# Altium PCB HT66F0185_NightLED_V4.0.PcbDoc
Units mil, origin at the board's own origin, x right, y up, seen from the top; angles counter-clockwise.
Board outline 1500 x 1600 mil, 2 copper layers (Top Layer, Bottom Layer); 62 components, 45 nets, 173 pads, 74 vias.
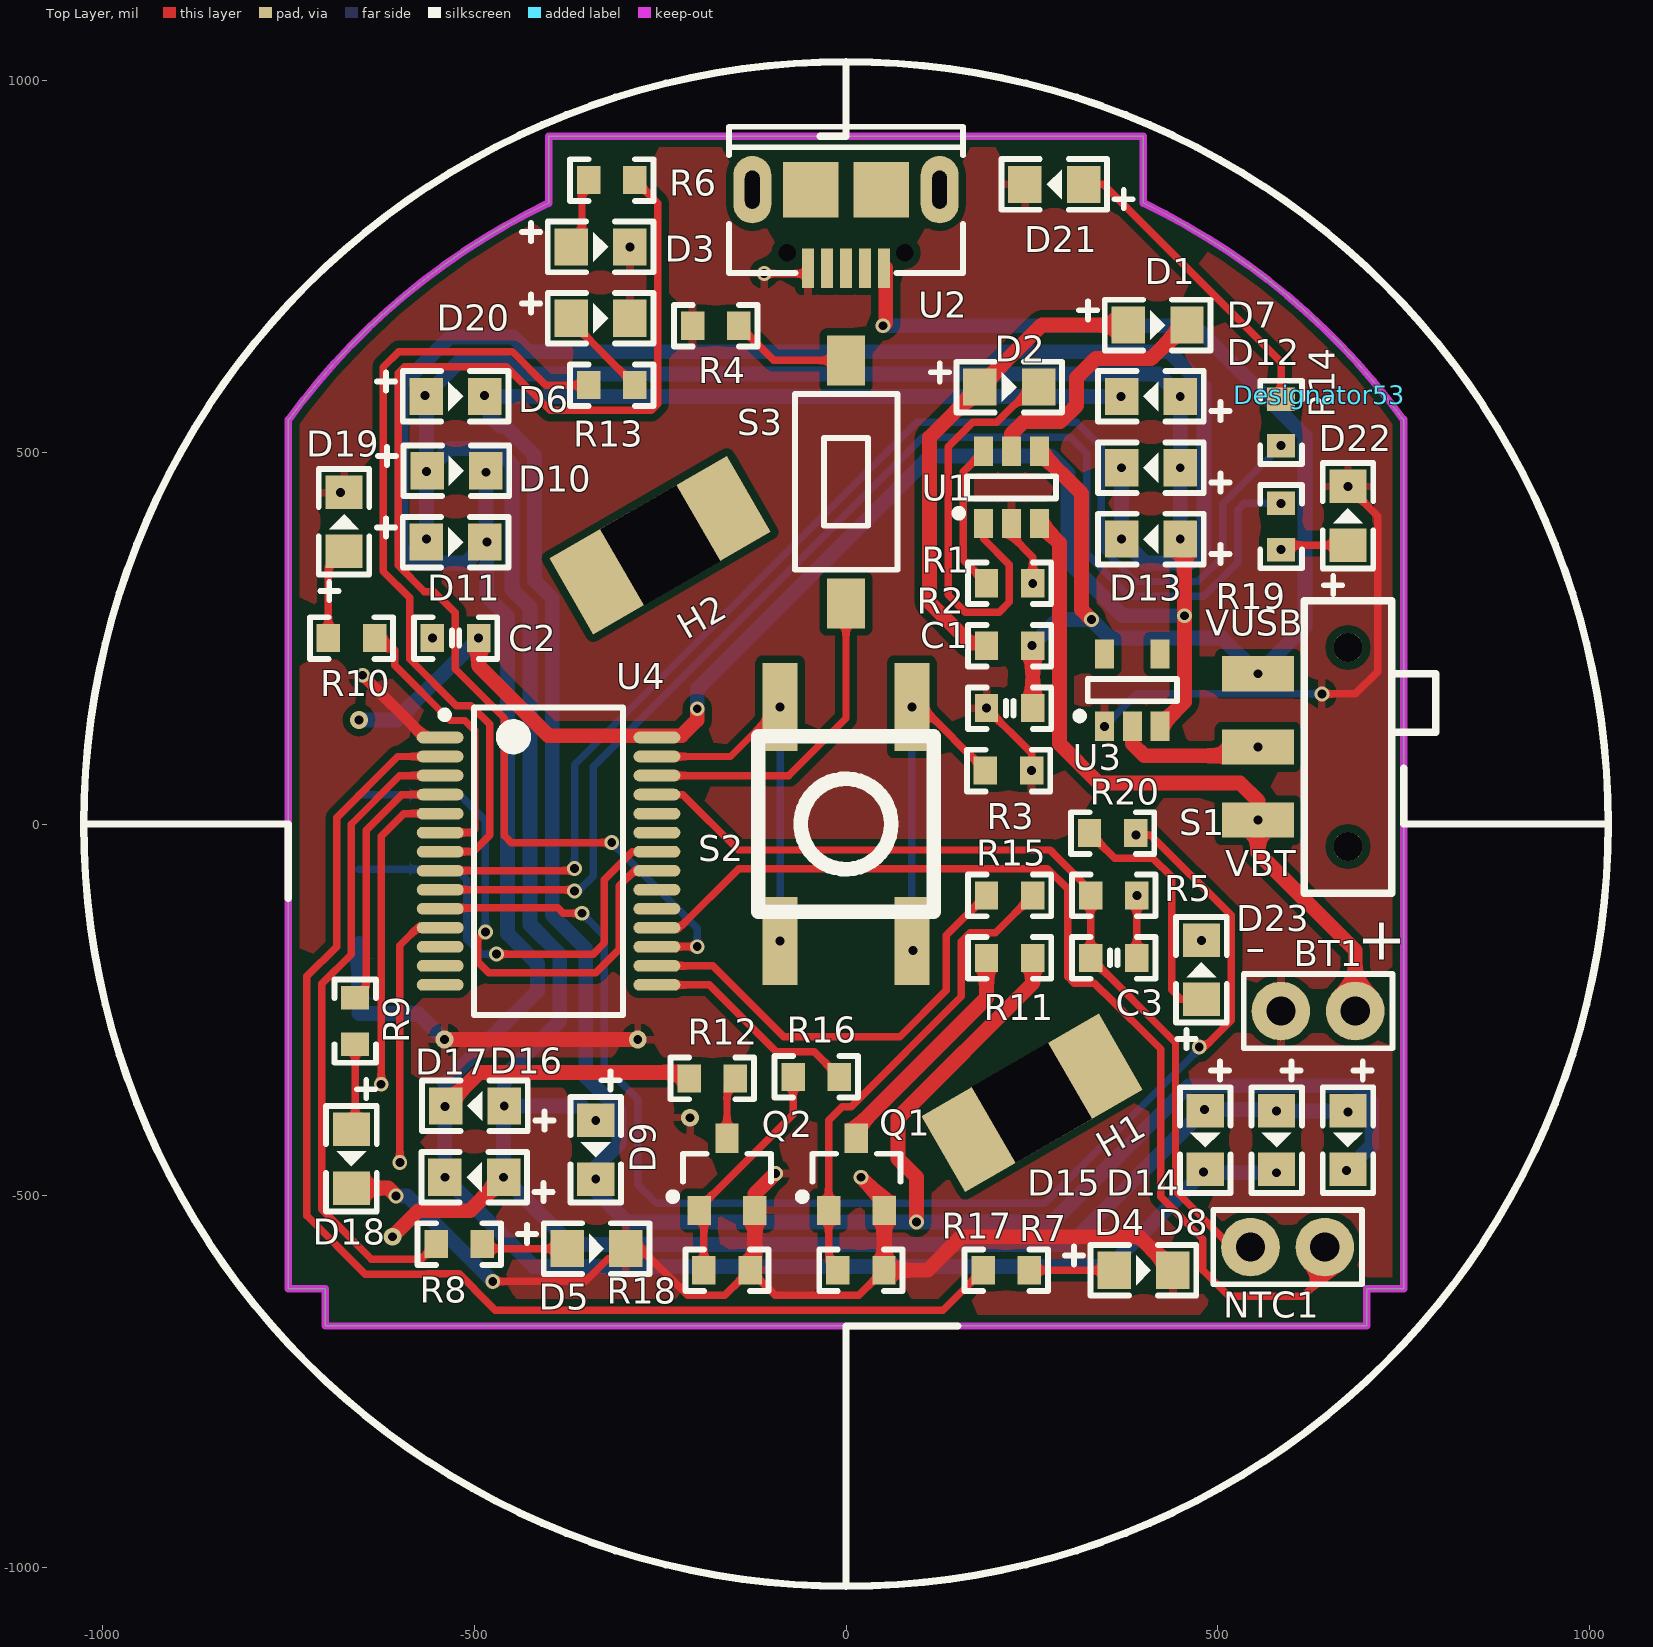
[diagram p0: Top Layer view]
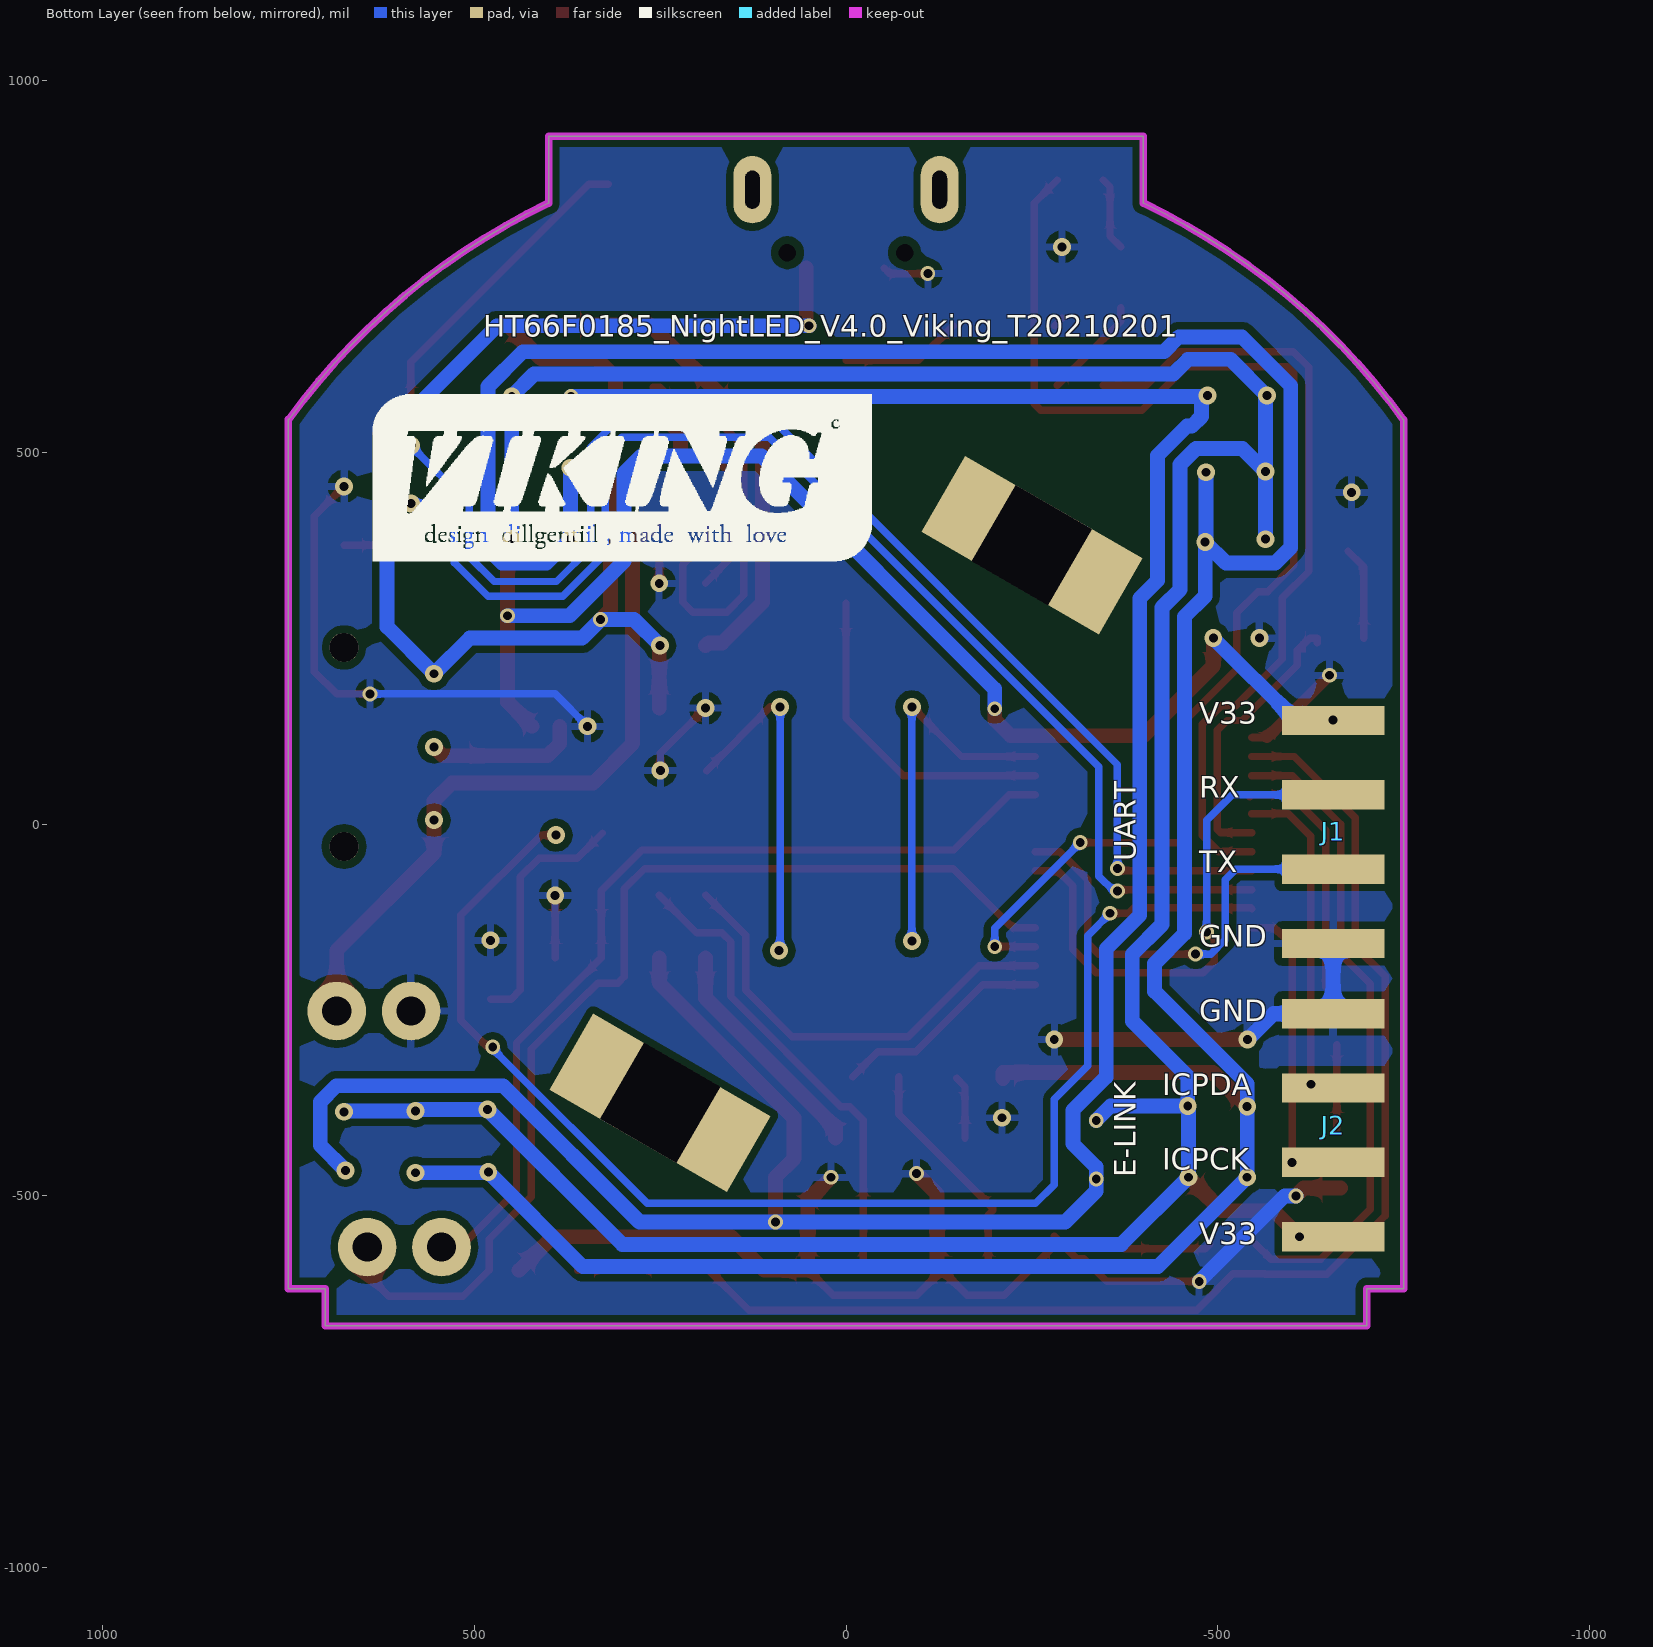
[diagram p1: Bottom Layer view, seen from below]

## Layer stack, top to bottom
Top Solder: solder mask 0.4, Solder Resist, Dk 3.5
Top Layer: signal copper 1.4
Dielectric 1: dielectric 12.6, FR-4, Dk 4.8
Bottom Layer: signal copper 1.4
Bottom Solder: solder mask 0.4, Solder Resist, Dk 3.5

## Board outline
-750,-625 -750,543.62 -749.65,543.36 cw(c0,0) -399.99,835 -400,835 -400,925 400,925 400,835 399.99,835 cw(c0,0) 749.13,544.09 750,544.09 750,-625 700,-625 700,-675 -700,-675 -700,-625

## Design rules (kind name [scope] priority, off if disabled: settings)
Clearance [All] p1: gap=10 ignorepadtopadclearanceinfootprint=TRUE except(0: Arc-Hole Track-Hole SMDPad-Hole THPad-Hole Via-Hole Fill-Hole Poly-Hole Region-Hole Text-Hole)
ComponentClearance [All] p1: gap=-1 collisioncheckmode=3 verticalgap=-1 showdistances=TRUE
HoleSize [All] p1: absolutevalues=TRUE maxlimit=500 minlimit=1 maxpercent=80.000 minpercent=20.000
MinimumSolderMaskSliver [All] p1: minsoldermaskwidth=1
PolygonConnect [All] p1: connectstyle=Relief reliefconductorwidth=10 reliefentries=4 polygonreliefangle="90 Angle" airgapwidth=10
RoutingVias [All] p1: holewidth=12 width=20 viastyle="Through Hole" minholewidth=10 minwidth=10 maxholewidth=50 maxwidth=100
SilkToSilkClearance [All] p1: silktosilkclearance=-1
SilkToSolderMaskClearance [IsPad] p1: minsilkscreentomaskgap=-1 clearancetoexposedcopper=TRUE
SolderMaskExpansion [All] p1: expansion=4
UnRoutedNet [All] p1: checkbadconnections=TRUE
Width [All] p1: maxlimit=20 minlimit=10 preferedwidth=20 minimp=50.000000 maximp=50.000000 favimp=50.000000
24 further rules are at their usual default settings.

## Components (designator, comment, footprint, x,y, rotation, side; value= is the part's Value field where it differs from the comment)
BT1 "BT_SMD" PIN_2 634.81,-251.5 r180 top
C1 "Cap" C_0603 220,155.79 r0 top value=104
C2 "Cap" C_0603 -525,250 r180 top value=104
C3 "Cap" C_0603 359.95,-180 r180 top value=103
D1 "LED0" LED_0805(Y) 419.03,670.95 r0 top
D2 "LED0" LED_0805(Y) 219.5,587.58 r0 top
D3 "LED0" LED_0805(Y) -330,776 r0 top
D4 "LED0" LED_0805(Y) 400,-600 r0 top
D5 "LED0" LED_0805(Y) -335.47,-570.95 r0 top
D6 "LED0" LED_0805(Y) -525,575 r0 top
D7 "LED0" LED_0805(Y) 410,575 r180 top
D8 "LED0" LED_0805(Y) 675,-425 r270 top
D9 "LED0" LED_0805(Y) -336.47,-438 r270 top
D10 "LED0" LED_0805(Y) -523.89,475 r0 top
D11 "LED0" LED_0805(Y) -525,379.05 r0 top
D12 "LED0" LED_0805(Y) 410,479.05 r180 top
D13 "LED0" LED_0805(Y) 410,383.11 r180 top
D14 "LED0" LED_0805(Y) 579.05,-425 r270 top
D15 "LED0" LED_0805(Y) 483.11,-425 r270 top
D16 "LED0" LED_0805(Y) -499,-379.05 r180 top
D17 "LED0" LED_0805(Y) -500,-475 r180 top
D18 "LED0" LED_0805(Y) -665,-450 r270 top
D19 "LED0" LED_0805(Y) -675,406.53 r90 top
D20 "LED0" LED_0805(Y) -330,680.05 r0 top
D21 "LED0" LED_0805(Y) 280,860 r180 top
D22 "LED0" LED_0805(Y) 675,414.5 r90 top
D23 "LED0" LED_0805(Y) 477.89,-195.89 r90 top
Designator53 "Comment" LOGO_VIKING_S 636.56,577 r180 top
H1 "HOLE" "SCREW HOLE_NIGHTLED_V4.0" 250,-375 r120 top locked
H2 "HOLE" "SCREW HOLE_NIGHTLED_V4.0" -250,375 r120 top locked
J1 "SIP4" "PIN_4(SMD) - duplicate" -555.79,139.29 r0 bottom locked
J2 "SIP4" "PIN_4(SMD) - duplicate" -555.79,-255 r0 bottom locked
NTC1 "NTC-5516" PIN_2 593.92,-568.92 r180 top
Q1 "NPN-8050" SOT_23_3 14.01,-471.05 r0 top
Q2 "NPN-8050" SOT_23_3 -160,-471.05 r0 top
R1 "Res1" R_0603 220,323.68 r180 top value=1.66k
R2 "Res1" R_0603 220,239.73 r180 top value=1.66k
R3 "Res1" R_0603 218.61,71.84 r180 top value=1.66k
R4 "Res1" R_0603 -175.05,670.05 r0 top value=1.66k
R5 "Res1" R_0603 359.95,-96.05 r180 top value=100k
R6 "Res1" R_0603 -315,865.95 r0 top value=1.66k
R7 "Res1" R_0603 215.47,-600 r180 top value=1.66k
R8 "Res1" R_0603 -520,-564.95 r180 top value=1.66k
R9 "Res1" R_0603 -660,-265 r90 top value=1.66k
R10 "Res1" R_0603 -664.95,250 r0 top value=1.66k
R11 "Res1" R_0603 220,-180 r180 top value=1k
R12 "Res1" R_0603 -179.95,-342.11 r0 top value=1k
R13 "Res1" R_0603 -315,590.11 r180 top value=1.66k
R14 "Res1" R_0603 585.05,539.95 r270 top value=1.66k
R15 "Res1" R_0603 220,-96.05 r180 top value=1k
R16 "Res1" R_0603 -40,-340 r0 top value=1k
R17 "Res1" R_0603 20,-600 r0 top value=100k
R18 "Res1" R_0603 -160,-600 r0 top value=100k
R19 "Res1" R_0603 585.05,400 r90 top value=1.66k
R20 "Res1" R_0603 358.56,-12.11 r0 top value=1.66k
S1 "SW-SPDT" SW-SPDT 675,103.59 r270 top
S2 "SW-PB" "MICRO BUTTON_4_SMD" 0,0 r90 top locked
S3 "SW-PB" "micro button_2_SMD" 0,460 r90 top
U1 "TP4057" SOT_23_6 222.6,452.63 r0 top
U2 "USB_ISP_V5" MICROUSB 0,925 r180 top locked
U3 "HT7533-3" SOT_23_5 385,180 r0 top
U4 "HT66F0185" SSOP_28 -400,-50 r0 top locked

## Footprints (in the part's own frame and the unit in brackets; to place one, negate y for a bottom-side part, rotate by r counter-clockwise, add the part's x,y. Pads: shape width x height; smd on the part's side, far side on the other; paste and mask are expansions set on the pad)
C_0603 [mm]
  rect 0.8x0.96 smd: 1(-0.79,0) 2(0.79,0)
  silkscreen extent -1.42,-0.71 1.42,0.71, body extent -0.76,-0.39 0.76,0.39, height 0.9
LED_0805(Y) [mil]
  rect 45x50 smd: 1(-39.5,0) 2(39.5,0)
  silkscreen extent -106,-34 71,34, body extent -40,-25 40,25, height 39
LOGO_VIKING_S [mil]
"micro button_2_SMD" [mm]
  rect 1.7x1.3 smd: 1(-4.15,0) 2(4.15,0)
  silkscreen extent -3,-1.76 3,1.74, body extent -4.5,-1.75 4.5,1.75, height 4.51
"MICRO BUTTON_4_SMD" [mm]
  rect 3x1.2 smd: 1(-4,2.25) 1(4,2.25) 2(-4,-2.25) 2(4,-2.25)
  silkscreen extent -3,-3 3,3, body extent -3.55,-3 3.55,3, height 5.51
MICROUSB [mm]
  round 0.3 hole 0.6: 0(-2,3.981) 0(2,3.981)
  rect 0.4x1.35 smd: 1(-1.3,4.506) 2(-0.65,4.506) 3(0,4.506) 4(0.65,4.506) 5(1.3,4.506)
  oval 1.3x2.3 hole 0.5 slot 1.3 at 90 deg: 6(-3.2,1.831) 6(3.2,1.831)
  rect 1.9x1.9 smd: 6(-1.2,1.831) 6(1.2,1.831)
  silkscreen extent -4,-0.32 4,4.68
PIN_2 [mm]
  round 2 hole 1: 1(-1.27,0) 2(1.27,0)
  silkscreen extent -2.54,-1.27 2.54,1.27, body extent -2.54,-1.27 2.54,1.27, height 8.51
"PIN_4(SMD) - duplicate" [mm]
  rect 3.5x1 smd: 1(-2.52,7.62) 2(-2.52,5.08) 3(-2.52,2.54) 4(-2.52,0)
  body extent -4.04,-1.27 -1.5,8.77, height 8.51
R_0603 [mm]
  rect 0.8x0.96 smd: 1(-0.79,0) 2(0.79,0)
  silkscreen extent -1.42,-0.71 1.42,0.71, body extent -0.76,-0.38 0.76,0.38, height 0.41
"SCREW HOLE_NIGHTLED_V4.0" [mm]
  rect 3x7 hole 3 square: 19(0,0)
  body extent -2.6,-2.6 2.6,2.6, height 2.55
SOT_23_3 [mm]
  rect 0.8x1 smd: 1(0,1.235) 2(-0.95,-1.235) 3(0.95,-1.235)
  silkscreen extent -1.98,-0.89 1.5,0.7, body extent -1.45,-1.19 1.45,1.19, height 1.02
SOT_23_5 [mm]
  rect 0.65x1 smd: 1(-0.95,-1.235) 2(0,-1.235) 3(0.95,-1.235) 4(0.95,1.235) 5(-0.95,1.235)
  silkscreen extent -1.92,-1.01 1.52,0.38, body extent -1.45,-1.19 1.45,1.19, height 1.02
SOT_23_6 [mm]
  rect 0.65x1 smd: 1(-0.95,-1.235) 2(0,-1.235) 3(0.95,-1.235) 4(0.95,1.235) 5(0,1.235) 6(-0.95,1.235)
  silkscreen extent -1.92,-1.01 1.52,0.38, body extent -1.45,-1.19 1.45,1.19, height 1.02
SSOP_28 [mm]
  oval 1.6x0.4 smd: 1(-3.702,4.225) 2(-3.702,3.575) 3(-3.702,2.925) 4(-3.702,2.275) 5(-3.702,1.625) 6(-3.702,0.975) 7(-3.702,0.325) 8(-3.702,-0.325) 9(-3.702,-0.975) 10(-3.702,-1.625) 11(-3.702,-2.275) 12(-3.702,-2.925) 13(-3.702,-3.575) 14(-3.702,-4.225) 15(3.702,-4.225) 16(3.702,-3.575) 17(3.702,-2.925) 18(3.702,-2.275) 19(3.702,-1.625) 20(3.702,-0.975) 21(3.702,-0.325) 22(3.702,0.325) 23(3.702,0.975) 24(3.702,1.625) 25(3.702,2.275) 26(3.702,2.925) 27(3.702,3.575) 28(3.702,4.225)
  silkscreen extent -3.67,-5.25 2.54,5.25, body extent -3.93,-5.1 3.93,5.1, height 2.05
SW-SPDT [mm] "SW-SPDT"
  round 1 hole 1: 0(-3.4,0) 0(3.4,0)
  rect 1.2x2.45 smd: 1(-2.5,-3.075) 2(0,-3.075) 3(2.5,-3.075)
  silkscreen extent -5,-1.5 5,3

## Part data
C1 C2 C3: "Capacitor", LatestRevisionDate=17-Jul-2002, LatestRevisionNote="Re-released for DXP Platform.", PackageDescription="Radial Cap, Thru-Hole; 2 Leads; 0.3 in Pin Spacing", PackageReference=RAD-0.3, Published=8-Jun-2000, Publisher="Altium Limited"
D1 D2 D3 D4 D5 D6 D7 D8 D9 D10 D11 D12 D13 D14 D15 D16 D17 D18 D19 D20 D21 D22 D23: "Typical INFRARED GaAs LED", LatestRevisionDate=08-Jul-2005, LatestRevisionNote="Mech Layer 1 removed.", PackageDescription="LED; 2 Leads", PackageReference=LED-0, Published=8-Jun-2000, Publisher="Altium Limited"
J1 J2: "jointbar"
NTC1: library part NTC, "NTC"
Q1 Q2: library part NPN, "NPN Bipolar Transistor", Code_JEDEC=TO-226-AA, LatestRevisionDate=17-Jul-2002, LatestRevisionNote="Re-released for DXP Platform.", PackageDescription="TO, Flat Index; 3 In-Line, Axial Leads; Body Dia. 4.8mm; Leads 0.55 x 0.51 mm (max)", PackageReference=TO-226-AA, Published=8-Jun-2000, Publisher="Altium Limited"
R1 R2 R3 R4 R5 R6 R7 R8 R9 R10 R11 R12 R13 R14 R15 R16 R17 R18 R19 R20: "Resistor", LatestRevisionDate=17-Jul-2002, LatestRevisionNote="Re-released for DXP Platform.", PackageDescription="Axial Device, Thru-Hole; 2 Leads; 0.3 in Pin Spacing", PackageReference=AXIAL-0.3, Published=8-Jun-2000, Publisher="Altium Limited"
S1: "SPDT Subminiature Toggle Switch, Right Angle Mounting, Vertical Actuation", ComponentLink1Description="Manufacturer Link", ComponentLink1URL=http://www.apem.com, DatasheetVersion=05-Dec-2000, LatestRevisionDate=17-Dec-2003, LatestRevisionNote="Schematic revised, PCB Footprint replaced.", PackageDescription="Switch; 4 Leads", PackageReference=TL36WW15050, Published=24-Mar-1999, Publisher="Altium Limited"
S2 S3: "Switch", LatestRevisionDate=17-Jul-2002, LatestRevisionNote="Re-released for DXP Platform.", PackageDescription="Switch; 2 Leads", PackageReference=SPST-2, Published=24-Mar-1999, Publisher="Altium Limited"
U2: library part JP5, "USB"

## Via types
v1: diameter 24, hole 12, Top Layer to Bottom Layer, tented both sides, 49 vias
v2: diameter 20, hole 12, Top Layer to Bottom Layer, tented both sides, 25 vias

## Nets (pads, with @x,y where several pads share a name; then routed paths per layer and width w, separated by ;. In a path a pad name is that pad's centre, name@x,y a point inside that pad or via, vN(x,y) a via of type N, cw(c..) or ccw(c..) an arc to the next point about the centre after c; other vN are vias at no path point)
AN2: C3.2 NTC1.2 R5.2 U4.25 | length 1221.3
  Top Layer w10: U4.25 -219.57,39.57 -145,-35 275,-35 277.22,-37.22 276.41,-37.22 328.84,-89.65 R5.2 C3.2 443.11,-294.26 443.11,-493.21 518.81,-568.92 NTC1.2
GND: BT1.2 C1.1 C2.2 C3.1 D3.2 D4.2 D5.2 D18.2 D19.2 D20.2 D21.2 D22.2 D23.2 J1.1 J2.4 Q1.3 Q2.3 R1.1 R3.1 R4.1 R5.1 R17.2 R18.2 U1.2 U2.5 U3.1 U4.1 | length 3231
  Top Layer w10: U4.1@-566.34,116.34 U4.1 ; v2(-475,-615) -350.31,-615 -320,-584.69 -310.33,-584.69 -280,-554.36 -280,-566.96 -213.06,-633.9 -162.8,-633.9 R18.2 -95,-633.9 17.2,-633.9 R17.2 ; D20.2 D20.2@-280.49,670.05 ; v2(-110,740) -58.78,740 U2.5 ; v1(188.9,155.79) 249.71,94.97 v1(249.71,71.84) ; U1.2 222.6,387.4 251.1,358.9 v1(251.1,323.68) ; C3.1 v1(391.05,-96.05) ; v2(640,175) 685,175 715,205 715,414 v1(675,454)
  Top Layer w15: v2(-650,200) U4.1@-566.34,116.34
  Top Layer w20: D18.2 -615.5,-489.5 v2(-605,-500) ; v1(-540,-290) v1(-280,-290) ; R18.2 -122.6,-593.7 Q2.3 -122.6,-497.6 v2(-95,-470) ; v2(20,-475) 51.41,-506.41 Q1.3 51.41,-599.69 R17.2 109.72,-600 154.72,-555 394.5,-555 D4.2
  Bottom Layer w10: v1(347.6,131.38) 391.22,175 v2(640,175)
  Bottom Layer w20: J1.1 J2.4 -575,-255 v1(-540,-290) ; v2(-605,-500) -590,-500 v2(-475,-615)
  other v1: -210,-395 477.89,-156.39 -556.1,250 -680,446.03 -290.5,776
ICPCK: J2.2 U4.11 | length 355.7
  Top Layer w10: v2(-600,-455) -600,-163.42 -576.14,-139.57 U4.11
ICPDA: J2.3 U4.5 | length 425.3
  Top Layer w10: v2(-625,-350) -625,-16.57 -594.46,13.98 U4.5
LED1: R7.2 U4.2 | length 1709.6
  Top Layer w10: U4.2 -602.54,90.75 -685,8.28 -685,-165 -725,-205 -725,-526.5 -646.22,-605.28 -563.15,-605.28 -562.87,-605 -520,-605 -500,-625 -500,-625.36 -471.46,-653.9 130.47,-653.9 R7.2
LED1_POWER: R15.2 U4.16 | length 604.7
  Top Layer w10: U4.16 -179.25,-190.75 -83.9,-286.1 72.57,-286.1 135,-223.68 135,-149.75 188.7,-96.05 R15.2
LED2: R8.2 U4.3 | length 871.1
  Top Layer w10: R8.2 -571.44,-585.28 -571.72,-585 -638.21,-585 -705,-518.21 -705,-215 -665,-175 -665,0 -599.84,65.16 U4.3
LED2_POWER: R16.2 U4.15 | length 296.6
  Top Layer w10: U4.15 -183.66,-216.34 -93.9,-306.1 -42.8,-306.1 R16.2
LED3: R9.2 U4.4 | length 354.7
  Top Layer w10: R9.2 -645,-218.9 -645,-8.28 -597.15,39.57 U4.4 U4.4@-543.05,36.85
LED4: R10.2 U4.6 | length 385.2
  Top Layer w10: R10.2@-633.84,243.6 R10.2 -623.45,250 -606.85,233.4 -606.85,213.57 -532.5,139.21 -512.67,139.21 -499.27,125.81 -499.27,-6.95 -503.94,-11.61 U4.6
LED5: R13.2 U4.7 | length 1079
  Top Layer w10: U4.7 -501.24,-37.2 -479.27,-15.23 -479.27,134.1 -504.38,159.21 -524.21,159.21 -586.85,221.85 -586.85,304.41 -622,339.56 -622,614.5 -601.5,635 -448.5,635 -403.61,590.11 R13.2
LED6: R14.2 U4.8 | length 1747.1
  Top Layer w10: U4.8 -367.8,-62.8 v2(-365,-60)
  Bottom Layer w10: v2(-365,-60) -365,80 95,540 310,540 343.5,506.5 343.5,371.92 389.32,326.11 473.11,326.11 506.5,359.5 506.5,430.29 v1(585.05,508.84)
LED7: R19.2 U4.9 | length 1731
  Top Layer w10: U4.9 -366.61,-88.39 v2(-365,-90)
  Bottom Layer w10: v2(-365,-90) -359.64,-90 -340,-70.36 -340,76.72 103.28,520 301.72,520 323.5,498.22 323.5,363.64 381.03,306.11 481.39,306.11 526.5,351.21 526.5,422.01 535.59,431.1 v1(585.05,431.1)
LED8: R20.2 U4.10 | length 1816
  Top Layer w10: U4.10 -544.47,-112.68 -387.32,-112.68 -380,-120 v2(-355,-120) ; v1(390,-15) 410,-15 517.89,-122.89 517.89,-264.1 481.99,-300 v2(475,-300)
  Bottom Layer w10: v2(-355,-120) -325,-150 -325,-325 -280,-370 -280,-485 -254.8,-510.2 267.35,-510.2 475,-302.55 v2(475,-300)
LED_TP: R6.2 U4.17 | length 1772.9
  Top Layer w10: v2(-315,-25) -450,-25 -459.27,-15.73 -459.27,142.38 -525.35,208.47 -525.35,283.9 -554.02,312.56 -566.85,312.56 -566.85,312.69 -602,347.84 -602,606.21 -593.21,615 -456.79,615 -398,556.21 -261.94,556.21 -253,565.14 -253,835.05 R6.2 ; U4.17 -254.08,-165 v2(-200,-165)
  Bottom Layer w10: v2(-315,-25) -200,-140 v2(-200,-165)
NetD1_1: D1.1 D2.1 R2.2 | length 652.5
  Top Layer w20: R2.2 185,243.63 166.37,243.63 112.4,297.6 112.4,519.98 D2.1 263.37,670.95 D1.1
NetD1_2: D1.2 U1.5 | length 343
  Top Layer w20: U1.5 222.6,524.61 238.92,540.94 288.14,540.94 310,562.79 310,600 335.95,625.95 410.31,625.95 456.92,672.55 D1.2
NetD2_2: D2.2 U1.1 | length 571.2
  Top Layer w10: U1.1 185.2,383.24 219.65,348.79 219.65,298.57 206.07,285 160.36,285 137.4,307.95 137.4,507.15 170.25,540 202.63,540 250.2,587.58 D2.2
NetD3_1: D3.1 R6.1 | length 99.6
  Top Layer w10: D3.1 -355,790.5 -355,857.05 R6.1
NetD4_1: D4.1 R7.1 | length 113.9
  Top Layer w10: R7.1 D4.1
NetD5_1: D5.1 R8.1 | length 116.4
  Top Layer w10: R8.1 -482.9,-570.95 D5.1
NetD6_2: D6.2 D7.2 D8.2 D9.2 R11.1 | length 3709
  Top Layer w20: v2(95,-535.2) 95,-475 70,-450 70,-395.3 251.1,-214.2 R11.1
  Bottom Layer w20: v1(-486,576) v1@-478,568 ; v2(370,575) -478,575 v1@-478,568 ; v1(673,-466) 707,-432 707,-373.75 685.25,-352 460.91,-352 277.7,-535.2 v2(95,-535.2) -294.8,-535.2 -336.47,-493.53 v2(-336.47,-477.5) -336.47,-461.47 -305,-430 -305,-385 -350,-340 -350,-167.72 -395,-122.72 -395,303.48 -419.08,327.56 -419.08,495.76 -458.32,535 -465,535 -478,548 v1@-478,568
NetD10_2: D10.2 D11.2 D12.2 D13.2 D14.2 D15.2 D16.2 D17.2 R12.1 | length 4538.6
  Top Layer w20: v1(-539.5,-380.05) D16.2 -493.5,-334.05 -211.05,-334.05 R12.1
  Bottom Layer w20: v1(-484,473) -484,380 v1(-483,379) ; v1(370.5,479.05) v1(370.5,383.11) 402.5,351.11 462.75,351.11 481.5,369.85 481.5,588.25 434.75,635 -427.57,635 -447.57,655 -532.25,655 -598,589.25 -598,371.75 -577.25,351 -511,351 v1(-483,379) ; v1(579,-469) 482,-469 v1(481,-468) 353.8,-595.2 -419.3,-595.2 v1(-539.5,-475) v1(-539.5,-380.05) -539.5,-349.5 -415,-225 -415,-187.57 -455,-147.57 -455,278.63 -483,306.63 v1(-483,379)
NetD18_1: D18.1 R9.1 | length 113.9
  Top Layer w10: D18.1@-660,-410.5 R9.1@-660,-296.57
NetD19_1: D19.1 R10.1 | length 125.7
  Top Layer w10: R10.1 -696.05,345.98 D19.1
NetD20_1: D20.1 R13.1 | length 139.7
  Top Layer w10: D20.1@-369.5,694.4 D20.1 -369.5,675.71 R13.1
NetD21_1: D21.1 R14.1 | length 414.6
  Top Layer w10: D21.1 346.16,860 585.05,621.11 R14.1
NetD22_1: D22.1 R19.1 | length 92.5
  Top Layer w10: v1(585.05,368.9) 591.16,375 D22.1
NetD23_1: D23.1 R20.1 | length 331.8
  Top Layer w10: R20.1 361.35,-46 412.72,-46 437.89,-71.18 437.89,-222.89 450.39,-235.39 D23.1
NetQ1_1: Q1.1 R11.2 | length 314.9
  Top Layer w20: Q1.1 14.01,-408.86 188.9,-233.98 R11.2
NetQ1_2: Q1.2 R15.1 R17.1 | length 649.7
  Top Layer w10: R17.1 -23.39,-587.71 Q1.2 -23.39,-398.39 -5,-380 6.96,-380 155,-231.96 155,-158.04 166.94,-146.1 201.05,-146.1 R15.1
NetQ2_1: Q2.1 R12.2 | length 84.9
  Top Layer w10: Q2.1 -160,-353.26 R12.2
NetQ2_2: Q2.2 R16.1 R18.1 | length 314.9
  Top Layer w10: R18.1 -191.1,-525.97 Q2.2 -197.4,-516.48 -71.1,-390.18 R16.1
NetR1_2: R1.2 U1.6 | length 202.1
  Top Layer w10: U1.6 157.4,473.46 157.4,355.18 R1.2
NetR3_2: R3.2 S2.2 | length 462.5
  Top Layer w10: v1(88.58,157.48) 101.87,157.48 R3.2
  Bottom Layer w10: v1(88.58,157.48) 88.58,-168.58 v1(90,-170)
NetR4_2: R4.2 S3.2 | length 163.3
  Top Layer w10: R4.2 -97.29,623.39 S3.2
NetS2_1: S2.1 U4.27 | length 508.3
  Top Layer w10: U4.27 -155.32,90.75 v1(-88.58,157.48)
  Bottom Layer w10: v1(-88.58,-157.48) v1(-88.58,157.48)
NetS3_1: S3.1 U4.26 | length 440.6
  Top Layer w10: U4.26 -77.02,65.16 0,142.17 S3.1
RX: J1.3 U4.21 | length 732.2
  Top Layer w10: v2(-485,-145) -495,-155 -495,-185.36 -480.36,-200 -336.72,-200 -305,-168.28 -305,-83.18 -284.62,-62.8 U4.21
  Bottom Layer w10: J1.3 -519.29,39.29 -485,5 v2(-485,-145)
TX: J1.2 U4.22 | length 602.1
  Top Layer w10: v2(-470,-175) -340,-175 -325,-160 -325,-74.89 -287.31,-37.2 U4.22
  Bottom Layer w10: J1.2 -524.29,-60.71 -510,-75 -510,-155.36 -490.36,-175 v2(-470,-175)
V33: C2.1 D6.1 D7.1 D8.1 D9.1 D10.1 D11.1 D12.1 D13.1 D14.1 D15.1 D16.1 D17.1 J1.4 J2.1 U3.3 U4.28 | length 5997.5
  Top Layer w20: v1(-610,-555) -575,-520 -505.5,-520 v1(-460.5,-475) ; v1(-493.9,250) -493.9,212.37 -400.15,118.62 -221.38,118.62 -200,140 v2(-200,155) ; D16.1@-460.5,-380.05 v1(-459.5,-379.05) ; U3.3 455,163.98 455,200.46 455.2,200.65 455.2,256.59 455,256.79 v2(455,280) 455,377.61 v1(449.5,383.11)
  Bottom Layer w20: v1(-655,140) -603.9,140 v1(-493.9,250) ; v1(-564,383) v1(-564,474) ; v2(-336.47,-398.5) -355.92,-379.05 v1(-459.5,-379.05) ; v2(-200,155) -200,181.36 113.64,495 275,495 298.5,471.5 298.5,353.28 371.78,280 v2(455,280) ; v1(449.5,383.11) v1(449.5,479.05) v1(449.5,575) 419.5,605 -440,605 -460,625 -517,625 v1(-566,576) -564,574 v1(-564,474) ; v1(675,-387) 674,-386 v1(579,-386) 577,-384 v1(482,-384) 300.8,-565.2 -370.3,-565.2 v1(-460.5,-475) -460.5,-380.05 v1(-459.5,-379.05) ; v1(-564,474) -533,505 -470.75,505 -449.08,483.33 -449.08,315.14 -425,291.06 -425,-135.15 -385,-175.15 -385,-265 -459.5,-339.5 v1(-459.5,-379.05)
VBT: BT1.1 S1.3 U1.3 | length 946
  Top Layer w20: U1.3@257.4,404.01 U1.3 260.99,404.01 286.85,378.15 286.85,108.15 340,55 530,55 553.94,31.06 v1(553.94,5.16) 553.94,-38.94 684.81,-169.81 BT1.1
VCC_IN: S1.2 U3.2 | length 204
  Top Layer w20: U3.2 385,108.01 401.32,91.69 542.04,91.69 v1(553.94,103.59)
VREF: NTC1.1 U4.18 | length 1428.4
  Top Layer w10: U4.18 -223.86,-139.57 -144.29,-60 270.91,-60 298.1,-87.19 298.1,-205.11 306.88,-213.9 333.9,-213.9 346.09,-226.09 346.65,-226.09 423.11,-302.55 423.11,-501.5 480,-558.39 480,-600 515,-635 615,-635 643.92,-606.08 NTC1.1
VUSB: C1.2 R2.1 S1.1 U1.4 U2.1 | length 1744.7
  Top Layer w10: U2.1 U2.1@53.46,745.31
  Top Layer w20: v2(50,670) 53.46,673.46 53.46,745.31 U2.1@53.46,747.6 ; C1.2 R2.1 ; U1.4 316.85,444.4 316.85,288.15 v2(330,275)
  Bottom Layer w20: v2(50,670) 469.15,670 617.05,522.1 617.05,265.13 v1(553.94,202.01) 505.95,250 355,250 v2(330,275) 285,275 v1(250,240)
pads on no net: H1.19 H2.19 S1.0 U2.0 U2.2 U2.3 U2.4 U2.6 U3.4 U3.5 U4.12 U4.13 U4.14 U4.19 U4.20 U4.23 U4.24

## Polygon pours and split planes (outlines as drawn)
GND on Top Layer "GND_L01_P008" (solid, remove dead copper, pour order 8): 750,-700 750,950 -750,950 -750,-700
GND on Bottom Layer "GND_L02_P010" (solid, remove dead copper, pour order 10): 750,950 750,-700 -750,-700 -750,950

## Keep-outs
Keep-Out Layer:
  lines w10: 749.13,544.09 ccw(c0,0) 399.99,835 400,925 -400,925 -400,835 ccw(c0,0) -749.65,543.36 -750,543.62 -750,-625 -700,-625 -700,-675 700,-675 700,-625 750,-625 750,544.09

## Silkscreen, mask and mechanical layers (free items; w line width, h text height)
Top Overlay:
  circle w10: c0,0 r1025
  lines w10: -1025,0 -750,0 -750,-100 ; -35,925 0,925 0,1025 ; 0,-1025 0,-675 150,-675 ; 750,75 750,0 1025,0
  text "VUSB" at 483,242 h60
  text "VBT" at 510,-82 h60
  text "+" at 687,-202 h100
  text "-" at 536,-210 h100
Bottom Overlay:
  text "HT66F0185_NightLED_V4.0_Viking_T20210201" at 488,645 h50
  text "V33" at -475,125 h50
  text "RX" at -475,25 h50
  text "UART" at -400,-50 h50 r270
  text "TX" at -475,-75 h50
  text "GND" at -475,-175 h50
  text "GND" at -475,-275 h50
  text "ICPDA" at -425,-375 h50
  text "ICPCK" at -425,-475 h50
  text "E-LINK" at -400,-475 h50 r270
  text "V33" at -475,-575 h50